# EAGLE board LEM_CAN (EAGLE 5.06)

Size 100 x 80 mm. Coordinates in mm from the lower left corner, seen from the top.
Outline: 0,0 100,0 100,80 0,80 0,0
Copper layers (1*16): Top 0.035mm / dielectric 1.5mm / Bottom 0.035mm
Design rules "default": minimum track width 10mil, minimum drill 24mil, track to track 8mil, track to pad 8mil, pad to pad 8mil, via to via 8mil, smd to smd 8mil, copper to edge 40mil, drill to drill 8mil, minimum pad ring 10mil, minimum via ring 8mil, stop-mask expansion 4mil, vias tented up to drill 0mil, thermal gap 10mil

## Footprints (pad centres in the part's own frame; a part is rotated, then mirrored left to right if it is on the bottom)
E2,5-5 = drill 0.813 pad 1.6 round: + -1.27,0 | drill 0.813 pad 1.6 octagon: - 1.27,0
C025-025X050 = drill 0.813 octagon: 1 -1.27,0; 2 1.27,0
DO41-10 = drill 1.118 round: A 5.08,0; C -5.08,0
ML34 = drill 0.914 octagon: 1 -20.32,-1.27; 2 -20.32,1.27; 3 -17.78,-1.27; 4 -17.78,1.27; 5 -15.24,-1.27; 6 -15.24,1.27; 7 -12.7,-1.27; 8 -12.7,1.27; 9 -10.16,-1.27; 10 -10.16,1.27; 11 -7.62,-1.27; 12 -7.62,1.27; 13 -5.08,-1.27; 14 -5.08,1.27; 15 -2.54,-1.27; 16 -2.54,1.27; 17 0,-1.27; 18 0,1.27; 19 2.54,-1.27; 20 2.54,1.27; 21 5.08,-1.27; 22 5.08,1.27; 23 7.62,-1.27; 24 7.62,1.27; 25 10.16,-1.27; 26 10.16,1.27; 27 12.7,-1.27; 28 12.7,1.27; 29 15.24,-1.27; 30 15.24,1.27; 31 17.78,-1.27; 32 17.78,1.27; 33 20.32,-1.27; 34 20.32,1.27
HTS_10-P/SP1 = drill 1.3 pad 2 round: I+ 3.2,-7.8; I- -3.2,-7.8 | drill 0.6 pad 1 round: VOUT 0.2,2.36
2X03 = drill 1.016 octagon: 1 -2.54,-1.27; 2 -2.54,1.27; 3 0,-1.27; 4 0,1.27; 5 2.54,-1.27; 6 2.54,1.27
2X06 = drill 1.016 octagon: 1 -6.35,-1.27; 2 -6.35,1.27; 3 -3.81,-1.27; 4 -3.81,1.27; 5 -1.27,-1.27; 6 -1.27,1.27; 7 1.27,-1.27; 8 1.27,1.27; 9 3.81,-1.27; 10 3.81,1.27; 11 6.35,-1.27; 12 6.35,1.27
DIL20 = drill 0.813 long: 1 -11.43,-3.81; 2 -8.89,-3.81; 3 -6.35,-3.81; 4 -3.81,-3.81; 5 -1.27,-3.81; 6 1.27,-3.81; 7 3.81,-3.81; 8 6.35,-3.81; 9 8.89,-3.81; 10 11.43,-3.81; 11 11.43,3.81; 12 8.89,3.81; 13 6.35,3.81; 14 3.81,3.81; 15 1.27,3.81; 16 -1.27,3.81; 17 -3.81,3.81; 18 -6.35,3.81; 19 -8.89,3.81; 20 -11.43,3.81
TEN3XXXX = drill 0.813 pad 1.422 long: 2 -11.43,-7.62; 3 -8.89,-7.62; 9 6.35,-7.62; 11 11.43,-7.62; 14 11.43,7.62; 16 6.35,7.62; 22 -8.89,7.62; 23 -11.43,7.62
0204/7 = drill 0.813 octagon: 1 -3.81,0; 2 3.81,0
SOCKET-04 = drill 0.813 long: 1 -1.27,-3.81; 2 1.27,-3.81; 3 1.27,3.81; 4 -1.27,3.81

## Placement (x,y rotation side)
C1  4.7µF  [E2,5-5]  -34.29,57.15 0 top  (outside the outline)
C2  10nF  [C025-025X050]  -22.86,58.42 0 top  (outside the outline)
C3  100nF  [C025-025X050]  -45.72,45.72 0 top  (outside the outline)
C4  100nF  [C025-025X050]  -16.51,58.42 0 top  (outside the outline)
C5  100µF  [E2,5-5]  -55.88,-33.02 0 top  (outside the outline)
C6  100nF  [C025-025X050]  -55.88,-40.64 0 top  (outside the outline)
D1  1N4007  [DO41-10]  -53.34,-48.26 0 top  (outside the outline)
EXT1  [ML34]  -69.85,-60.96 0 top  (outside the outline)
EXT2  [ML34]  -69.85,-73.66 0 top  (outside the outline)
IC2  LF 305-s  [HTS_10-P/SP1]  -87.63,-39.37 0 top  (outside the outline)
ISP  [2X03]  -101.6,-72.39 0 top  (outside the outline)
JUMPER  [2X06]  -40.64,-26.67 0 top  (outside the outline)
MAX186  [DIL20]  -26.67,48.26 0 top  (outside the outline)
PWS1  TEN_5-2423WI  [TEN3XXXX]  -29.21,31.75 0 top  (outside the outline)
R1  10  [0204/7]  -43.18,-3.81 0 top  (outside the outline)
R2  100  [0204/7]  -43.18,-8.89 0 top  (outside the outline)
R3  1000  [0204/7]  -43.18,-13.97 0 top  (outside the outline)
R4  10000  [0204/7]  -43.18,-19.05 0 top  (outside the outline)
R_CUSTOM  [SOCKET-04]  -54.61,-22.86 0 top  (outside the outline)

## Library data of the parts
C1-C6 R1-R4 = rcl
D1 = diode
EXT1 EXT2 = con-harting-ml
IC2 = lem2; OC_FARNELL: unknown; OC_NEWARK: unknown
ISP JUMPER = pinhead
MAX186 R_CUSTOM = ic-package
PWS1 = traco-electronic

## Nets
+5V: C3.1 EXT1.5 EXT1.6 ISP.2 MAX186.10 MAX186.20
+12V: D1.A
GND: C1.- C2.2 C3.2 C4.2 C6.2 EXT1.3 EXT2.4 ISP.6 MAX186.9 MAX186.13 MAX186.14 MAX186.18 PWS1.2 PWS1.3 PWS1.9 PWS1.16 R1.1 R2.1 R3.1 R4.1 R_CUSTOM.1 R_CUSTOM.2
MISO: EXT1.14 ISP.1
MOSI: EXT1.15 ISP.4
N$1: C2.1 MAX186.12
N$2: C5.+ IC2.I+ PWS1.14
N$3: C1.+ MAX186.11
N$5: C6.1 D1.C PWS1.22 PWS1.23
N$7: C5.- IC2.I- PWS1.11
N$8: JUMPER.1 R1.2
N$9: JUMPER.3 R2.2
N$10: JUMPER.5 R3.2
N$11: JUMPER.11 R_CUSTOM.3
N$12: JUMPER.9 R_CUSTOM.4
N$13: JUMPER.7 R4.2
N$14: C4.1 IC2.VOUT JUMPER.2 JUMPER.4 JUMPER.6 JUMPER.8 JUMPER.10 JUMPER.12 MAX186.1
RESET: EXT1.7 ISP.5
SCK: EXT2.33 ISP.3
SPIMISO: EXT1.25 MAX186.15
SPIMOSI: EXT1.27 MAX186.17
SPISCK: EXT1.29 MAX186.19

## Tracks (layer width: path | path; a pad name or v marks a point on that pad's centre or on a via)
+5V  (5 unrouted)
GND  (21 unrouted)
MISO  (1 unrouted)
MOSI  (1 unrouted)
N$1  (1 unrouted)
N$2  (2 unrouted)
N$3  (1 unrouted)
N$5  (3 unrouted)
N$7  (2 unrouted)
N$8  (1 unrouted)
N$9  (1 unrouted)
N$10  (1 unrouted)
N$11  (1 unrouted)
N$12  (1 unrouted)
N$13  (1 unrouted)
N$14  (8 unrouted)
RESET  (1 unrouted)
SCK  (1 unrouted)
SPIMISO  (1 unrouted)
SPIMOSI  (1 unrouted)
SPISCK  (1 unrouted)